# EAGLE board Single LiPo, 5v Boost, and Auto-cutoff Charger (EAGLE 6.4)
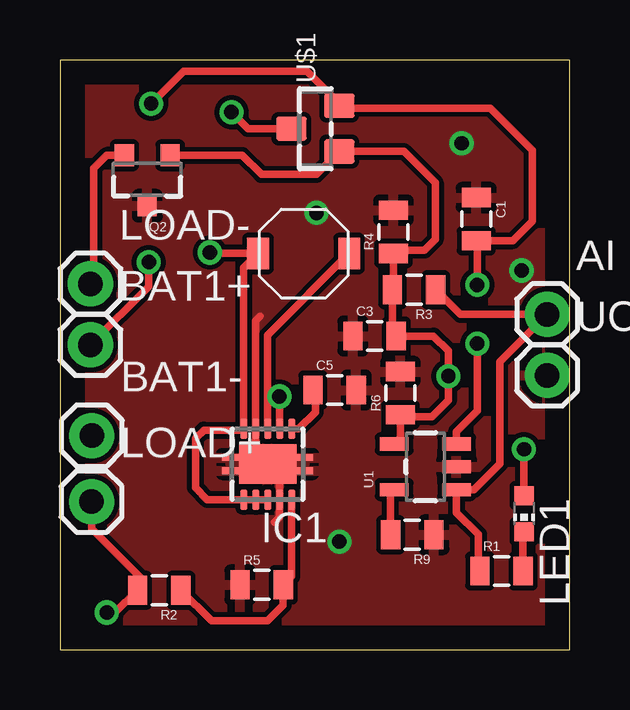
[diagram p0: board, top side]
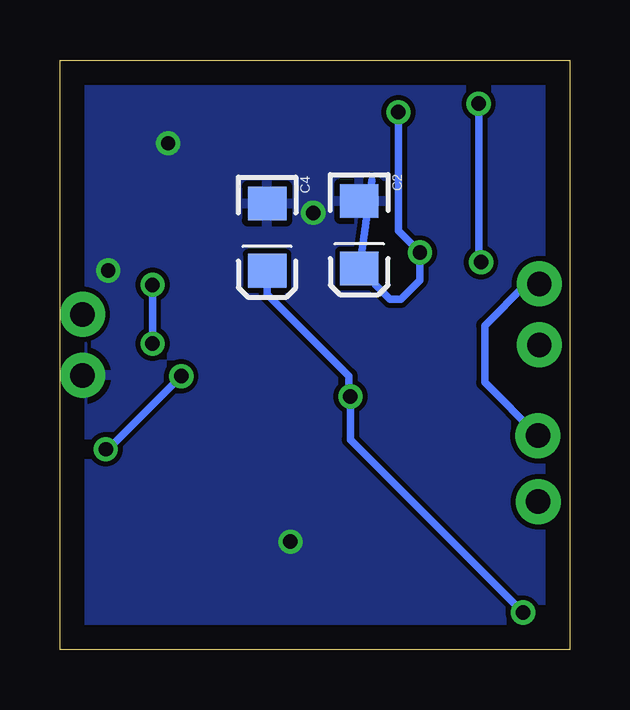
[diagram p1: board, bottom side, seen from below]

Size 21.26 x 24.57 mm. Coordinates in mm from the lower left corner, seen from the top.
Outline: 0,0 21.26,0 21.26,24.57 0,24.57 0,0
Copper layers (1*16): Top 0.035mm / dielectric 1.5mm / Bottom 0.035mm
Design rules "default": minimum track width 10mil, minimum drill 24mil, track to track 8mil, track to pad 8mil, pad to pad 8mil, via to via 8mil, smd to smd 8mil, copper to edge 40mil, drill to drill 8mil, minimum pad ring 10mil, minimum via ring 8mil, stop-mask expansion 4mil, vias tented up to drill 0mil, thermal gap 10mil

## Footprints (pad centres in the part's own frame; a part is rotated, then mirrored left to right if it is on the bottom)
VLF4012A = smd 0.9 x 1.3: P$1 -1.9,0; P$2 1.9,0
1X01 = drill 1.016 pad 1.88: 1 0,0
0805 = smd 0.8 x 1.2: 1 -0.9,0; 2 0.9,0
EIA3216 = smd 1.4 x 1.6: A 1.4,0; C -1.4,0
S-PDSO-N10 = smd 0.28 x 0.85: 1 -1,-1.475; 2 -0.5,-1.475; 3 0,-1.475; 4 0.5,-1.475; 5 1,-1.475; 6 1,1.475; 7 0.5,1.475; 8 0,1.475; 9 -0.5,1.475; 10 -1,1.475 | smd 2.4 x 1.65: PP 0,0 | smd 3.8 x 0.28: PP@1 0,0.275; PP@2 0,-0.275
CHIP-LED0603 = smd 0.8 x 0.8: A 0,-0.75; C 0,0.75
SOT23-3 = smd 0.8 x 0.9: 1 -0.95,-1; 2 0.95,-1; 3 0,1.1
SOT23-5 = smd 0.55 x 1.2: 1 -0.95,-1.3; 2 0,-1.3; 3 0.95,-1.3; 4 0.95,1.3; 5 -0.95,1.3
SOT-23 = smd 1 x 1.27: 1 -0.95,-1; 2 0.95,-1; 3 0,1

## Placement (x,y rotation side)
2.2UH  2.2UH  [VLF4012A]  10.16,16.51 0 top
AI  M01PTH  [1X01]  20.32,13.97 0 top
BAT1+  M01PTH  [1X01]  1.27,12.7 0 top
BAT1-  M01PTH  [1X01]  1.33,8.92 0 top
C1  1uF  [0805]  17.36,17.94 270 top
C2  10uF  [EIA3216]  8.78,17.29 270 bottom
C3  1uF  [0805]  13.12,13.07 0 top
C4  10uF  [EIA3216]  12.62,17.19 270 bottom
C5  0.1uF  [0805]  11.45,10.82 0 top
IC1  TPS61200  [S-PDSO-N10]  8.66,7.73 180 top
LED1  [CHIP-LED0603]  19.35,5.67 180 top
LOAD+  M01PTH  [1X01]  1.32,6.17 0 top
LOAD-  M01PTH  [1X01]  1.27,15.24 0 top
Q2  ZXMN3F30FH  [SOT23-3]  3.64,19.6 180 top
R1  330  [0805]  18.41,3.28 0 top
R2  1M  [0805]  4.14,2.48 180 top
R3  4.7  [0805]  14.77,15 180 top
R4  1k  [0805]  13.91,17.41 90 top
R5  180k  [0805]  8.41,2.7 0 top
R6  100k  [0805]  14.2,10.69 90 top
R9  2K  [0805]  14.69,4.79 180 top
U1  MCP73831  [SOT23-5]  15.24,7.62 90 top
U$1  DMP1045U  [SOT-23]  10.65,21.71 90 top
UCG  M01PTH  [1X01]  20.32,11.43 0 top

## Library data of the parts
2.2UH = PEBBLE
AI BAT1+ BAT1- C1-C5 LOAD+ LOAD- Q2 R1-R6 R9 U1 UCG = SparkFun
IC1 = texas; MPN: TPS61200DRCT; OC_FARNELL: 1471238; OC_NEWARK: 37M0066
LED1 = led
U$1 = zak

## Nets
3.7OUT: 2.2UH.P$1 C2.A IC1.5 IC1.6 IC1.7 IC1.8 U$1.3
3.7VIN: BAT1+.1 C1.2 U1.3 U$1.2
+5V: C3.2 LED1.A Q2.1 R3.2 R4.1 R6.1 U1.4 U$1.1
GND: C1.1 C2.C C3.1 C4.C C5.2 IC1.4 IC1.9 IC1.PP IC1.PP@1 IC1.PP@2 Q2.3 R4.2 R5.1 R6.2 R9.1 U1.2 UCG.1
N$1: C4.A IC1.2 LOAD+.1 R2.2
N$2: AI.1 R1.1 R3.1 U1.1
N$3: BAT1-.1 LOAD-.1 Q2.2
N$5: 2.2UH.P$2 IC1.3
N$8: C5.1 IC1.1
N$9: R9.2 U1.5
N$10: LED1.C R1.2
N$11: IC1.10 R2.1 R5.2

## Tracks (layer width: path | path; a pad name or v marks a point on that pad's centre or on a via)
3.7OUT  (via drill 0.6)
  Top 0.305: IC1.8 IC1.7 IC1.6 6.14,6.25 5.65,6.75 5.65,8.8 6,9.15 7.61,9.15 IC1.5 7.66,15.91 2.2UH.P$1 6.29,16.51 v6.25,16.55 | U$1.3 7.84,21.71 v7.15,22.4
  Bottom 0.305: 8.26,19.55 C2.A 7.49,14.6 7.05,14.6 6.25,15.4 v6.25,16.55 7.15,17.45 v7.15,22.4
3.7VIN  (via drill 0.6)
  Top 0.305: U1.3 16.54,9.09 17.4,9.95 v17.4,12.75 | v17.4,15.2 17.4,17 C1.2 18.89,17.04 19.7,17.85 19.7,20.8 17.95,22.55 11.76,22.55 U$1.2 11.65,22.75 10.3,24.1 5.15,24.1 v3.8,22.75 | v3.7,16.15 3.7,15.13 BAT1+.1
  Bottom 0.305: v17.4,12.75 v17.4,15.2 | v3.8,22.75 3.8,16.25 v3.7,16.15
+5V  (via drill 0.6)
  Top 0.305: Q2.1 7.6,20.6 8.4,19.8 10.69,19.8 U$1.1 14.34,20.76 15.65,19.45 15.65,17.1 15.2,16.65 14.05,16.65 R4.1 13.91,15.04 R3.2 13.87,13.22 C3.2 15.58,13.07 16.2,12.45 v16.2,11.4 16.2,10.4 15.5,9.7 14.29,9.7 R6.1 14.2,8.83 U1.4 | LED1.A v19.35,8.35
  Bottom 0.305: v19.35,8.35 19.25,8.35 v16.2,11.4
GND  (via drill 0.6)
  Top 0.305: 8.95,5.3 9.16,5.51 IC1.9 9.16,6.96 IC1.PP@1 | IC1.PP@2 8.39,8.01 8.15,8.25 8.15,9.2 | 8.15,9.2 IC1.4 | 8.15,9.2 8.15,13.7 8.35,13.9
  other vias: 11.65,4.5 16.75,21.1 19.25,15.8 10.7,18.2
  pour Bottom: 0,30.48 0,0 21.59,0 21.59,30.48
  pour Top: 0,30.48 0,0 21.59,0 21.59,30.48
N$1  (via drill 0.6)
  Top 0.305: IC1.2 v9.16,10.54 v9.15,10.55 | v1.95,1.55 2.31,1.55 R2.2 3.38,2.62 3.38,2.98 1.32,5.03 LOAD+.1
  Bottom 0.305: v1.95,1.55 9.15,8.75 v9.15,10.55 9.2,10.6 9.2,11.4 12.62,14.82 C4.A
N$2
  Top 0.305: R1.1 17.45,3.34 17.45,4.8 16.54,5.71 U1.1 17.27,6.67 18.35,7.75 18.35,12 AI.1 16.7,13.97 R3.1
N$3
  Top 0.305: Q2.2 1.95,20.6 1.4,20.05 1.4,15.37 LOAD-.1
  Bottom 0.305: LOAD-.1 1.81,15.24 3.55,13.5 3.55,11.14 BAT1-.1
N$5
  Top 0.305: IC1.3 8.66,13.11 2.2UH.P$2
N$8
  Top 0.305: IC1.1 9.96,9.21 10.65,9.9 10.65,10.72 C5.1
N$9
  Top 0.305: R9.2 13.79,6.52 U1.5
N$10
  Top 0.305: R1.2 19.31,4.88 LED1.C
N$11
  Top 0.305: IC1.10 9.66,3.05 R5.2 9.31,1.86 8.65,1.2 6.32,1.2 R2.1